# Altium PCB SunRefPCB.PcbDoc
Units mil, origin at the board's own origin, x right, y up, seen from the top; angles counter-clockwise.
Board outline 3254.33 x 2228.74 mil, 2 copper layers (Top Layer, Bottom Layer); 43 components, 27 nets, 186 pads, 42 vias.
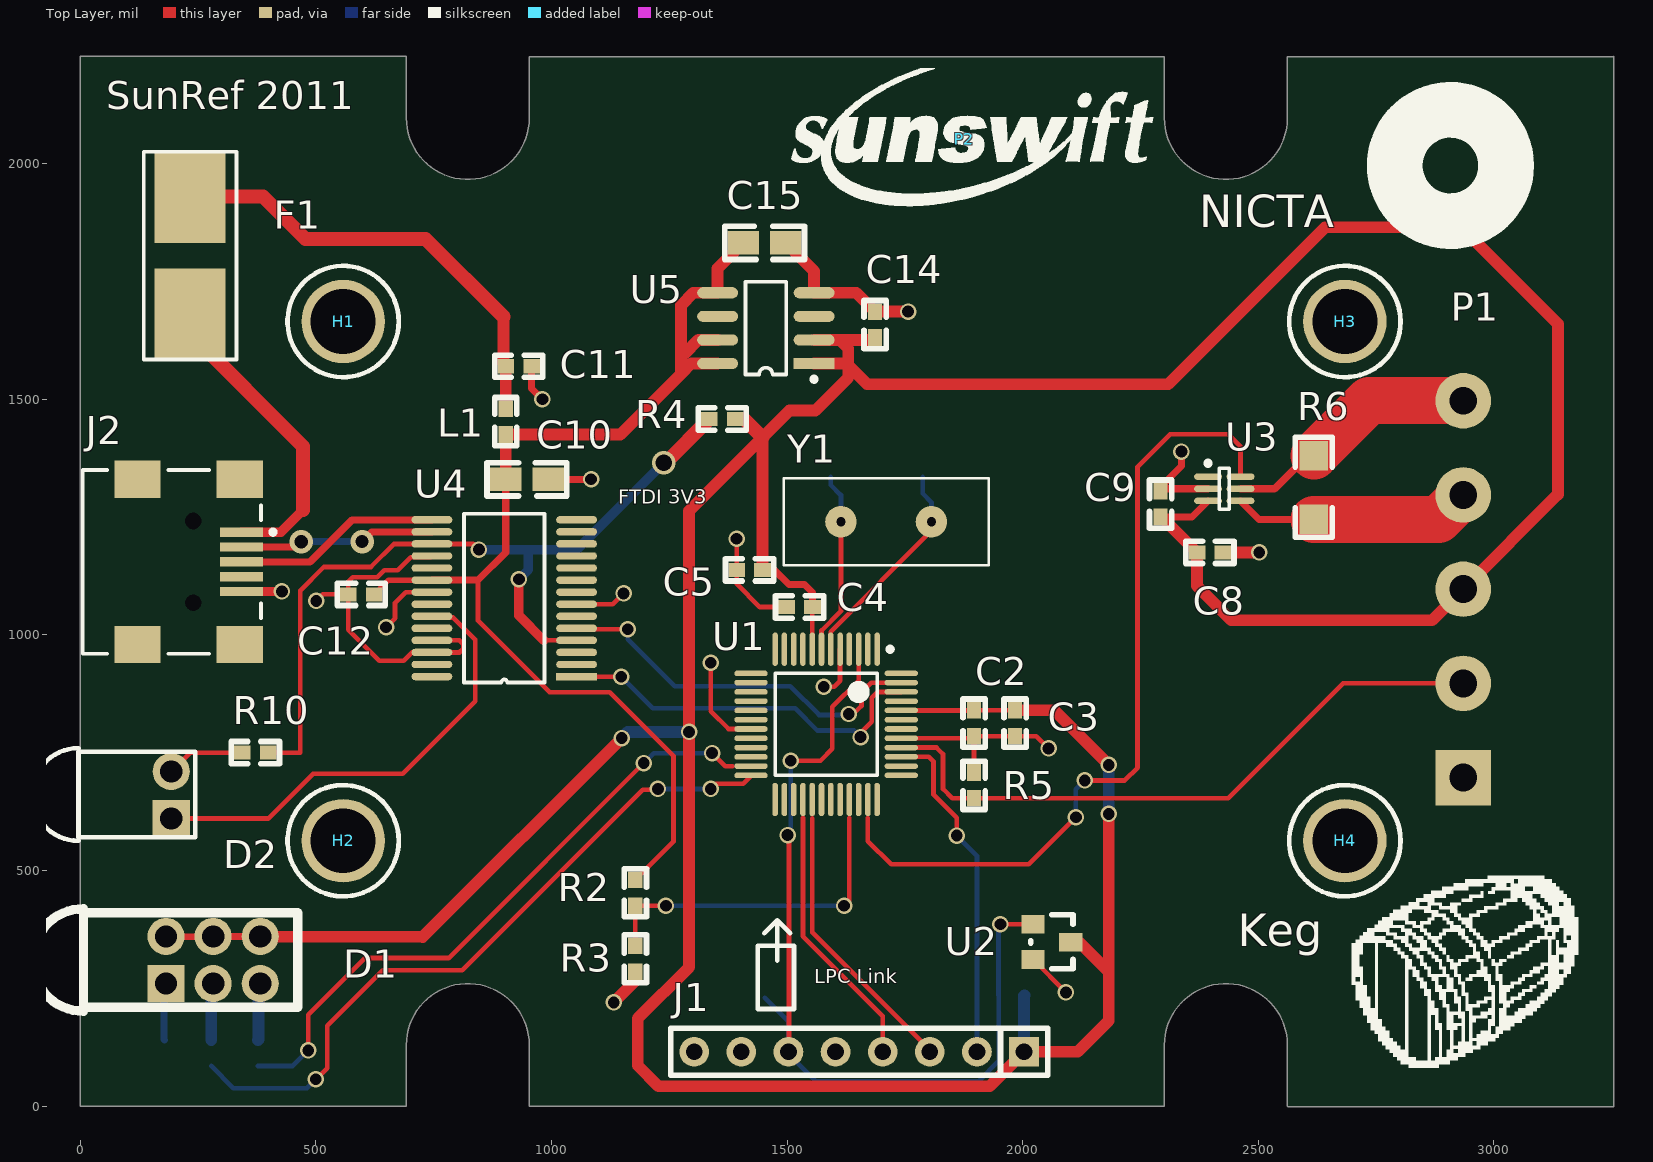
[diagram p0: Top Layer view]
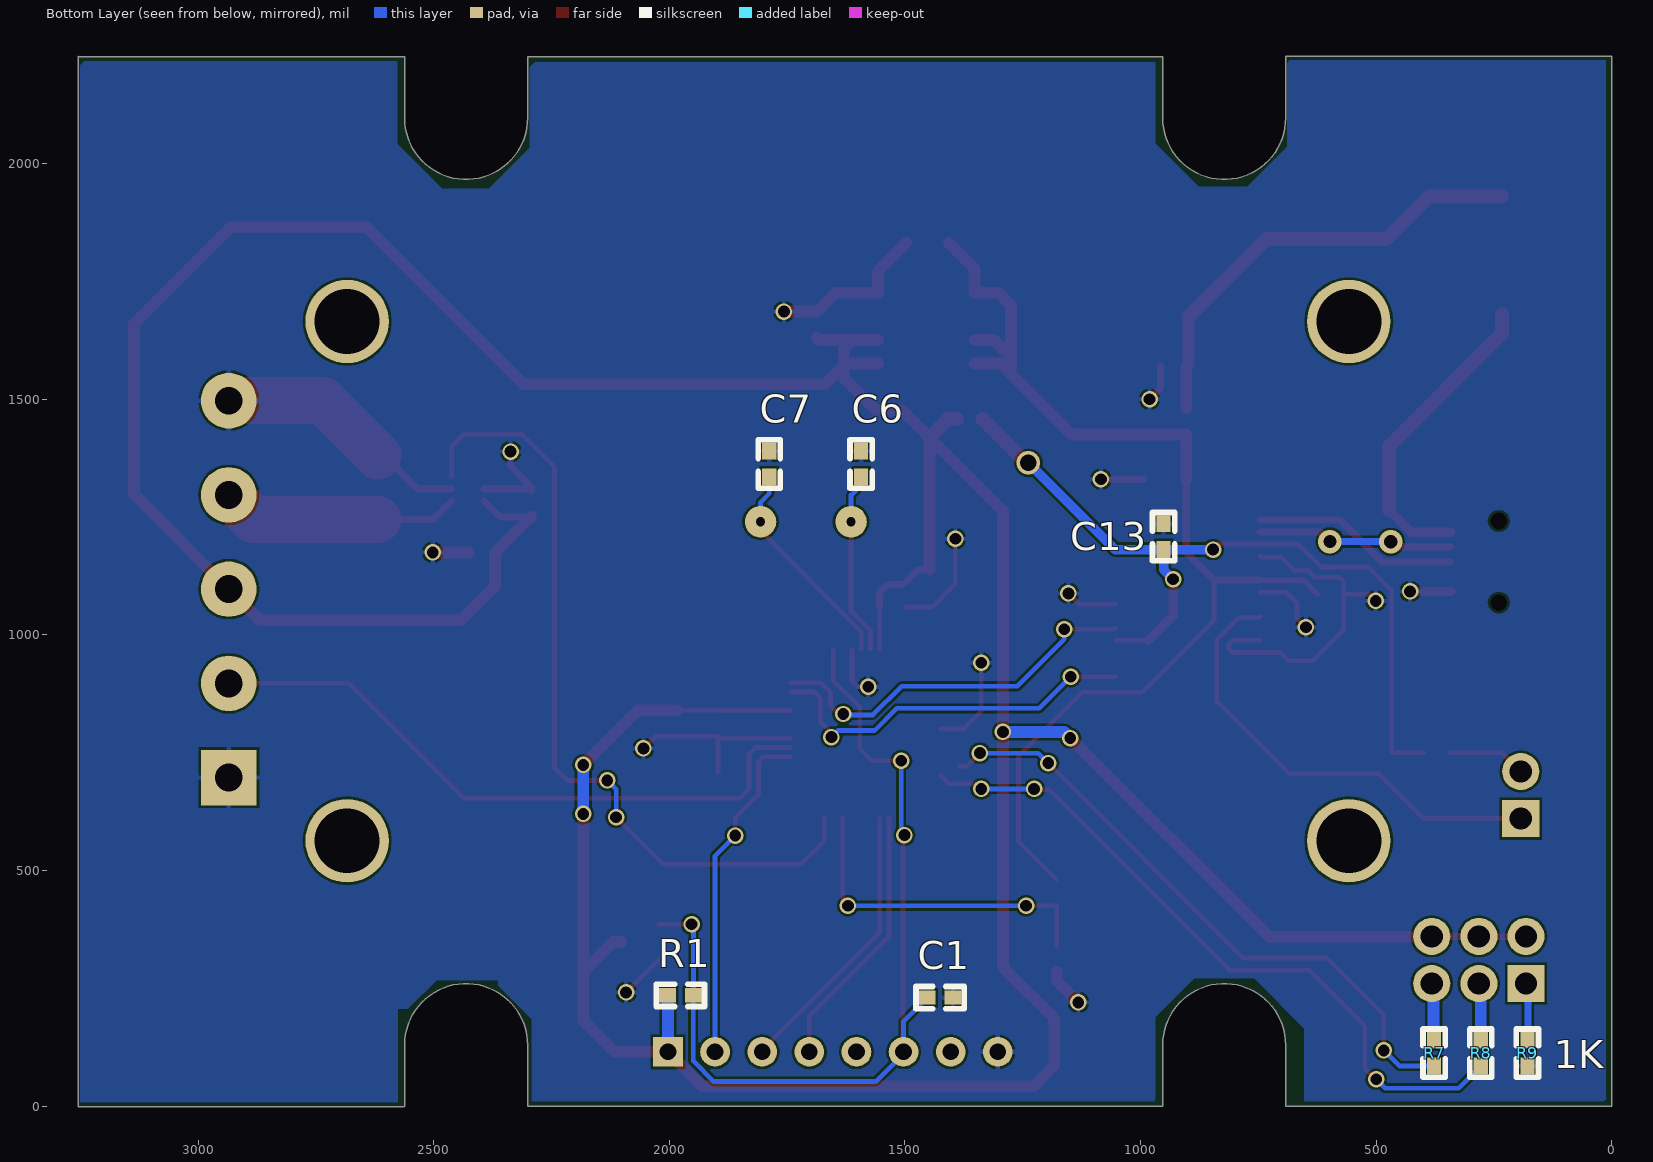
[diagram p1: Bottom Layer view, seen from below]

## Layer stack, top to bottom
Top Layer: signal copper 1.4
Dielectric: dielectric 12.6, FR-4, Dk 4.8
Bottom Layer: signal copper 1.4

## Board outline
0,-1 691.93,-1 691.93,129.32 cw(c822.44,129.32) 952.95,129.32 952.95,-1 2300.98,-1 2300.98,129.32 cw(c2431.5,129.32) 2562.01,129.32 2562.01,-1 2562.2,-1.2 3254.13,-1.2 3254.13,2227.54 3253.94,2227.35 2562.01,2227.35 2562.01,2097.03 cw(c2431.5,2097.03) 2300.98,2097.03 2300.98,2227.35 952.95,2227.35 952.95,2097.03 cw(c822.44,2097.03) 691.93,2097.03 691.93,2227.54 -0.2,2227.54

## Design rules (kind name [scope] priority, off if disabled: settings)
Clearance [All] p1: gap=5
HoleSize [All] p1: absolutevalues=TRUE maxlimit=150 minlimit=1 maxpercent=80.000 minpercent=20.000
MinimumSolderMaskSliver [All] p1: minsoldermaskwidth=0
PolygonConnect [All] p1: connectstyle=Relief reliefconductorwidth=10 reliefentries=4 polygonreliefangle="90 Angle"
RoutingVias [All] p1: holewidth=28 width=50 viastyle="Through Hole" minholewidth=15 minwidth=20 maxholewidth=40 maxwidth=50
SilkToSilkClearance [All] p1 off: silktosilkclearance=0
SilkscreenOverComponentPads [All] p1: minsilkscreentomaskgap=0
SolderMaskExpansion [All] p1: expansion=4
Width [All] p1: maxlimit=100 minlimit=10 preferedwidth=20
24 further rules are at their usual default settings.

## Classes and differential pairs
component class USBserial: C10 C11 C12 C13 C14 C15 D2 F1 J2 L1 R4 R10 U4 U5
component class TopLevel: C9 D1 P1 R2 R3 R5 R6 R7 R8 R9 U3
component class LPC_Rep: C1 C2 C3 C4 C5 C6 C7 C8 J1 R1 U1 U2 Y1

## Components (designator, comment, footprint, x,y, rotation, side; value= is the part's Value field where it differs from the comment)
C1 "10nF" 0603 1453,230 r180 bottom
C2 "10nF" 0603 1897,785 r90 top
C3 "100nF" 0603 1984,785 r90 top
C4 "10nF" 0603 1499,1059 r0 top
C5 "100nF" 0603 1393,1138 r0 top
C6 "18pF" 0603 1593,1335 r90 bottom
C7 "18pF" 0603 1788,1335 r90 bottom
C8 "100nF" 0603 2370,1175 r0 top
C9 "Cap" 0603 2293,1250 r90 top
C10 "10u" 0805 993,1330 r180 top
C11 "100n" 0603 903,1570 r0 top
C12 "100n" 0603 624,1086 r180 top
C13 "100n" 0603 951,1181 r90 bottom
C14 "2.2u" 0603 1687,1686 r270 top
C15 "10u" 0805 1407,1832 r0 top
D1 "1882-2781" LED_TRILEVEL 182,260 r90 top
D2 "LED" 3mmLED 193,610 r90 top
F1 "500mA" LITTELFUSE-154 233,1805 r90 top
H1 "HOLE" M2.5 558,1665 r0 top
H2 "HOLE" M2.5 558,563 r0 top
H3 "HOLE" M2.5 2684,1665 r0 top
H4 "HOLE" M2.5 2684,563 r0 top
J1 "LPC SWD Connector" IDC8 2003,115 r180 top
J2 "USB_MINIB" USB/SM0.8-6H5 33,1155 r180 top
L1 "FERRITE" 0603 903,1480 r270 top
P1 "Connector" TERMBLOCK5 2935,697 r180 top
P2 "SUN_LOGO" SUNSWIFTLOGO 1876,2052 r0 top (schematic designator P1)
R1 "10k" 0603 1949,235 r0 bottom
R2 "1K" 0603 1178,425 r90 top
R3 "1K" 0603 1178,285 r90 top
R4 "Res3" 0603 1335,1458 r0 top
R5 "1K" 0603 1897,708 r270 top
R6 "0R0045" 1206 2618,1380 r270 top
R7 "1K" 0603 377,140 r270 bottom
R8 "1K" 0603 278,140 r270 bottom
R9 "1K" 0603 179,140 r270 bottom
R10 "1K" 0603 344,750 r0 top
U1 "LPC11C14" TSQFP50P900X900-48N 1583,810 r270 top
U2 "XC61CN2002MR" SOT23-3 2022,386 r270 top
U3 "INA214" "SOP6 - INA214" 2428,1310 r0 top
U4 "FT232R" SSOP28w 903,1080 r180 top
U5 "MIC5200" SO8 1455,1651 r90 top
Y1 "12 MHz" HC49/4H 1928,1240 r180 top

## Footprints (in the part's own frame and the unit in brackets; to place one, negate y for a bottom-side part, rotate by r counter-clockwise, add the part's x,y. Pads: shape width x height; smd on the part's side, far side on the other; paste and mask are expansions set on the pad)
3mmLED [mm]
  round 2 hole 1.2: A(2.54,0)
  rect 2x2 hole 1.2: K(0,0)
  silkscreen extent -1.2,-1.3 3.8,7.5
0603 [mil]
  rect 35.43x30 smd: 1(0,0) 2(55,0)
  silkscreen extent -24,-24 79,24
0805 [mm]
  rect 1.7x1.27 smd: 1(0,0) 2(2.286,0)
  silkscreen extent -1,-0.9 3.3,0.9
1206 [mil]
  rect 62.99x60 smd: 1(0,0) 2(135,0)
  silkscreen extent -39,-39 173,39
HC49/4H [mm]
  round 1.7 hole 0.5: 1(3.085,0) 2(7.965,0)
  silkscreen extent 0,-2.35 11.05,2.35
IDC8 [mm]
  rect 1.6x1.6 hole 0.9: 1(0,0)
  round 1.6 hole 0.9: 2(2.54,0) 3(5.08,0) 4(7.62,0) 5(10.16,0) 6(12.7,0) 7(15.24,0) 8(17.78,0)
  silkscreen extent -1.27,-1.27 19.05,1.27
LED_TRILEVEL [mm]
  rect 2x2 hole 1.2: 1(0,0)
  round 2 hole 1.2: 2(0,-2.54) 3(0,-5.08) 4(2.54,-5.08) 5(2.54,-2.54) 6(2.54,0)
  silkscreen extent -1.49,-7.11 4.03,7.21
LITTELFUSE-154 [mm]
  rect 5x3.81 smd: 1(-3.185,0) 2(3.185,0)
  silkscreen extent -5.6,-2.51 5.6,2.5
M2.5 [mm]
  round 4.5 hole 3.5: 1(0,0)
  silkscreen extent -3,-3 3,3
SO8 [mm]
  rect 0.6x2.2 smd: 1(-1.905,-2.6)
  oval 0.6x2.2 smd: 2(-0.635,-2.6) 3(0.635,-2.6) 4(1.905,-2.6) 5(1.905,2.6) 6(0.635,2.6) 7(-0.635,2.6) 8(-1.905,2.6)
  silkscreen extent -2.88,-2.72 2.5,1.1
"SOP6 - INA214" [mm] "TSOP, 6-Leads, Body 2.2x1.4mm (max), Pitch 0.65mm, IPC Medium Density"
  oval 1.5x0.35 smd: 0(-0.875,0.65) 1(-0.875,0) 2(-0.875,-0.65) 3(0.875,-0.65) 4(0.875,0) 5(0.875,0.65)
  silkscreen extent -1,-1.1 0.28,1.5, body extent -0.7,-1.07 0.7,1.08, height 1.1
SOT23-3 [mm]
  rect 1x1.25 smd: 1(0,0) 2(1.905,0) 3(0.965,2.032)
  silkscreen extent -0.51,-0.13 2.41,2.16
SSOP28w [mm]
  rect 2.2x0.4 smd: 1(-3.82,4.28)
  oval 2.2x0.4 smd: 2(-3.82,3.63) 3(-3.82,2.98) 4(-3.82,2.33) 5(-3.82,1.68) 6(-3.82,1.03) 7(-3.82,0.38) 8(-3.82,-0.27) 9(-3.82,-0.92) 10(-3.82,-1.57) 11(-3.82,-2.22) 12(-3.82,-2.87) 13(-3.82,-3.52) 14(-3.82,-4.17) 15(3.98,-4.17) 16(3.98,-3.52) 17(3.98,-2.87) 18(3.98,-2.22) 19(3.98,-1.57) 20(3.98,-0.92) 21(3.98,-0.27) 22(3.98,0.38) 23(3.98,1.03) 24(3.98,1.68) 25(3.98,2.33) 26(3.98,2.98) 27(3.98,3.63) 28(3.98,4.28)
  silkscreen extent -2.09,-4.5 2.25,4.6
SUNSWIFTLOGO [mil] "Sunswift Logo"
  silkscreen extent -367,-141 401,150
TERMBLOCK5 [mm]
  rect 3x3 hole 1.5: 1(0,0)
  round 3 hole 1.5: 2(0,-5.08) 3(0,-10.16) 4(0,-15.24) 5(0,-20.32)
TSQFP50P900X900-48N [mm]
  oval 1.8x0.3 smd: 1(-4.05,2.75) 2(-4.05,2.25) 3(-4.05,1.75) 4(-4.05,1.25) 5(-4.05,0.75) 6(-4.05,0.25) 7(-4.05,-0.25) 8(-4.05,-0.75) 9(-4.05,-1.25) 10(-4.05,-1.75) 11(-4.05,-2.25) 12(-4.05,-2.75) 25(4.05,-2.75) 26(4.05,-2.25) 27(4.05,-1.75) 28(4.05,-1.25) 29(4.05,-0.75) 30(4.05,-0.25) 31(4.05,0.25) 32(4.05,0.75) 33(4.05,1.25) 34(4.05,1.75) 35(4.05,2.25) 36(4.05,2.75)
  oval 0.3x1.8 smd: 13(-2.75,-4.05) 14(-2.25,-4.05) 15(-1.75,-4.05) 16(-1.25,-4.05) 17(-0.75,-4.05) 18(-0.25,-4.05) 19(0.25,-4.05) 20(0.75,-4.05) 21(1.25,-4.05) 22(1.75,-4.05) 23(2.25,-4.05) 24(2.75,-4.05) 37(2.75,4.05) 38(2.25,4.05) 39(1.75,4.05) 40(1.25,4.05) 41(0.75,4.05) 42(0.25,4.05) 43(-0.25,4.05) 44(-0.75,4.05) 45(-1.25,4.05) 46(-1.75,4.05) 47(-2.25,4.05) 48(-2.75,4.05)
  silkscreen extent -4.17,-2.75 2.75,3.58, body extent -3.5,-3.5 3.5,3.5, height 1.6
USB/SM0.8-6H5 [mm] "Connector; USB2.0, Type B, SM; 5 Position; Right Angle"
  rect 2.3x0.5 smd: 1(-7.85,-1.6) 2(-7.85,-0.8) 3(-7.85,0) 4(-7.85,0.8) 5(-7.85,1.6)
  rect 2.5x2 smd: 6(-7.75,4.45) 7(-2.25,4.45) 8(-7.75,-4.45) 9(-2.25,-4.45)
  round 0.6 hole 0.9 unplated: MH1(-5.25,2.2) MH2(-5.25,-2.2)
  silkscreen extent -9.68,-4.95 0.7,4.95, body extent -8.9,-4.95 0.7,4.95, height 3.9

## Part data
C1 C2 C3 C4 C5 C6 C7 C8 C10 C11 C12 C13 C14 C15: library part CAP, "Capacitor"
C9: "Capacitor"
D1: library part LED-TRILEVEL, "Three level LED"
F1: library part FUSE2, "Fuse"
H1 H2 H3 H4: "Hole"
J1: library part LPCLink_Connector
J2: library part USB_miniB_SMT, "USB Mini B Connector"
L1: library part INDUCTOR, "Inductor"
P1: library part CONN
R1 R2 R3 R5 R6 R7 R8 R9: library part RES1, "Resistor"
R4: "Resistor"
R10: library part "Res Semi", "Semiconductor Resistor"
U1: library part LPC11C14_Full
U2: library part XC61F, "SOT23 reset generator"
U4: "USB UART IC"
U5: "MIC5200 - SO8"
Y1: library part CRYSTAL, "Crystal"

## Free pads (board coordinates)
  round 118.11 on Top Overlay mask+7.87: 2(3134,1978)

## Via types
v1: diameter 35, hole 25, Top Layer to Bottom Layer, 39 vias
v2: diameter 50, hole 28, Top Layer to Bottom Layer, 2 vias
v3: diameter 50, hole 35, Top Layer to Bottom Layer, 1 vias

## Nets (pads, with @x,y where several pads share a name; then routed paths per layer and width w, separated by ;. In a path a pad name is that pad's centre, name@x,y a point inside that pad or via, vN(x,y) a via of type N, cw(c..) or ccw(c..) an arc to the next point about the centre after c; other vN are vias at no path point)
3V3: C2.2 C3.2 C4.2 C5.2 C8.1 C9.1 C14.2 D1.4 D1.5 D1.6 J1.1 P1.3 R1.2 R4.2 U1.8 U1.44 U2.3 U3.2 U5.1 U5.2 | length 9504
  Top Layer w10: U1.8 1553.47,1058.47 C4.2 ; U1.44 1896.53,839.53 C2.2 C3.2
  Top Layer w15: D1.6@182.01,358.99 282,359.5 D1.4 ; C5.2 1473,1138 1504,1107 1537,1107 1554,1090 C4.2 ; C9.1@2295,1250 2359.14,1250 U3.2
  Top Layer w25: D1.4 727,359 v1(1149,781) ; C5.2 1448,1419 ; U5.1 1626,1576 1630,1572 ; U5.2 1612,1626 ; C14.2 1682,1626 1612,1626 ; C3.2 2067,840 v1(2183,724) ; U2.3 2120,348 2183,285 ; v1(2183,620) 2183,285 ; C9.1 2295,1250 C8.1 2370,1104 2443,1031 2869,1031 P1.3 3136,1298 3136,1660 2931,1865 2642,1865 2309,1532 1670,1532 1630,1572 ; 1448,1419 1505,1476 1560,1476 1630,1546 1630,1572 ; 1448,1419 1292,1263 v1(1292,794) 1292,295 1183,186 1183,86 1227,42 1930,42 J1.1 2117,115 2183,181 2183,285 ; 1612,1626 1630,1608 1630,1572
  Top Layer w30: R4.2 1409,1458 1448,1419
  Bottom Layer w25: v1(1149,781) 1162,794 v1(1292,794) ; J1.1 2003,234 R1.2 ; v1(2183,620) v1(2183,724)
/RESET: C1.1 J1.6 R1.1 U1.3 U2.1 | length 1947.2
  Top Layer w10: v1(1501,575) 1504,575 1504,116 J1.6 ; v1(1508,733) 1571,733 1596,758 1596,847 1651.9,902.9 U1.3 ; v1(1953,386) U2.1
  Bottom Layer w10: C1.1 1503,180 J1.6 1503,111 1562,52 1905.76,52 1949.5,95.74 1949.5,234.5 R1.1 1949,382 v1(1953,386) ; v1(1501,575) 1508,582 v1(1508,733)
GND: C1.2 C2.1 C3.1 C4.1 C5.1 C6.2 C7.2 C8.2 C9.2 C10.1 C11.2 C12.2 C13.2 C14.1 C15.2 J1.8 J2.5 P1.1 P1.5 R3.1 R5.1 R6.1 R9.2 U1.5 U1.19 U1.41 U2.2 U3.1 U3.4 U4.7 U4.18 U4.21 U4.25 U4.26 U5.4 | length 3547.5
  Top Layer w10: v1(501,1072) 515,1086 C12.2 ; v1(649,1016) 668,1035 668,1068 690.63,1090.63 U4.21 ; U4.25 804.73,988.27 813,980 813,971 804.68,962.68 U4.26 704.12,962.68 686.44,945 635,945 569,1011 C12.2 ; U4.18 743.59,1164.69 701.4,1164.69 688,1151.29 688,1151.22 674,1137.22 645.52,1137.22 630.3,1122 578,1122 569,1113 C12.2 ; U4.7 1130.04,1065.04 v1(1153,1088) ; v1(1338,941) 1338,838 1375.84,800.16 U1.19 ; v1(1393,1204) C5.1 1393,1108 1442,1059 C4.1 ; v1(1578,890) 1600,890 1612.53,902.53 U1.5 ; U1.41 1892.47,780.47 C2.1 ; R5.1 C2.1 ; U2.2 v1(2092,241) ; v1(2055,759) 2029,785 C3.1 C2.1
  Top Layer w15: C11.2 958,1523 v1(981,1500) ; C10.1 v1(1084,1330) ; v1(2337,1389) 2337,1358 2293,1314 C9.2 2298,1310 U3.1 ; U3.4 2535,1310 2605,1380 R6.1
  Top Layer w20: J2.5 v1(427.99,1092.01)
  Top Layer w25: v1(1132,220) 1178,266 R3.1 ; C15.2 1557.36,1771.64 U5.4 1647,1726 C14.1 v1(1757,1686) ; C8.2 v1(2502,1175)
  Top Layer w100: R6.1 2735,1497 P1.5
LEDRED: R7.2 U1.23 | length 1338.1
  Top Layer w10: v1(484,118) 484,194 604,314 782,314 v1(1196,728) ; v1(1341,749) 1368.58,721.42 1384.14,721.42
  Bottom Layer w10: R7.2 451,85 v1(484,118) ; v1(1196,728) 1217,749 v1(1341,749)
LEDYLW: R8.2 U1.24 | length 1496.2
  Top Layer w10: v1(500,57) 501,57 524,80 524,170 642,288 811,288 1194,671 1228,671 v1(1226,673) ; v1(1338,673) 1349,684 1407.04,684 U1.24@1423.55,700.51
  Bottom Layer w10: R8.2 325,38 481,38 v1(500,57) ; v1(1226,673) v1(1338,673)
NetC11_1: C11.1 F1.2 L1.1 | length 967.9
  Top Layer w25: 898,1675 898,1575 C11.1 L1.1
  Top Layer w30: F1.2 387.61,1930.39 478,1840 733,1840 898,1675
NetD1_1: D1.1 R9.1 | length 120.4
  Bottom Layer w15: D1.1@178,260 178,141 R9.1
NetD1_2: D1.2 R8.1 | length 120
  Bottom Layer w25: R8.1 D1.2@278,260
NetD1_3: D1.3 R7.1 | length 125.4
  Bottom Layer w25: R7.1 378,141 D1.3@378,265
NetD2_A: D2.A R10.1 | length 167.6
  Top Layer w10: D2.A 233,750 R10.1
NetD2_K: D2.K U4.23 | length 991.3
  Top Layer w10: D2.K 399,610 494,705 684,705 838,859 838,989.95 791.21,1036.73 749.02,1036.73 U4.23
NetF1_1: F1.1 J2.1 | length 664.4
  Top Layer w20: J2.1 425.99,1217.99 473,1265
  Top Layer w30: F1.1 233,1640 473,1400 473,1265
NetJ2_2: J2.2 U4.16 | length 417.5
  Top Layer w15: J2.2 458.14,1186.5 v2(469.14,1197.5) ; v2(598,1198) 618.58,1218.58 U4.16
  Bottom Layer w15: v2(469.14,1197.5) 469.64,1198 v2(598,1198)
NetJ2_3: J2.3 U4.15 | length 441.2
  Top Layer w15: J2.3 488,1155 577.17,1244.17 U4.15
NetP1_2: P1.2 R5.2 U1.40 | length 1381.6
  Top Layer w10: U1.40 1817.21,760.79 1831,747 1831,673 1851,653 R5.2 2436,653 2680,897 P1.2
NetP1_4: P1.4 R6.2 U3.3 | length 510.4
  Top Layer w15: U3.3 2501.86,1245 R6.2
  Top Layer w100: R6.2 2883,1245 P1.4
NetR2_1: R2.1 R3.2 U1.33 | length 718.8
  Top Layer w10: R3.2 R2.1 v1(1243,425) ; v1(1621,425) 1632.21,436.21 1632.21,611.14
  Bottom Layer w10: v1(1243,425) v1(1621,425)
NetU1_35: U1.35 U3.5 | length 1722
  Top Layer w10: 1671.58,611.14 1671.58,562.42 1721,513 2013,513 v1(2113,613) ; v1(2132,691) 2217,691 2244,718 2244,1357 2313,1426 2436,1426 2462.45,1399.55 U3.5
  Bottom Layer w10: v1(2113,613) 2113,672 v1(2132,691)
NetU1_46: U1.46 U4.1 | length 816.6
  Top Layer w10: U4.1 1053.89,911 v1(1148,911) ; v1(1656,783) 1656,792 1680,816 1680,866 1692.9,878.9 U1.46
  Bottom Layer w10: v1(1148,911) 1215,844 1517,844 1564,797 1642,797 v1(1656,783)
NetU1_47: U1.47 U4.5 | length 827.1
  Top Layer w10: U4.5@1053.54,1014 U4.5 1055.25,1012 v1(1162,1012) ; v1(1631,832) 1641,832 1658,849 1658,878 1678.58,898.58 U1.47
  Bottom Layer w10: v1(1162,1012) 1162,991 1262,891 1507,891 1568,830 1633,830 v1(1631,832)
TCLK: J1.3 U1.29 | length 599.1
  Top Layer w10: 1553.79,610.83 1553.79,368.5 1803,119.28 J1.3
TDO: J1.4 U1.28 | length 566.2
  Top Layer w10: 1533.79,611.14 1533.79,360.21 1703,191 J1.4
TMS: J1.2 U1.39 | length 726.8
  Top Layer w10: U1.39 1800.9,741.1 1811,731 1811,661 1860,612 v1(1860,574)
  Bottom Layer w10: v1(1860,574) 1903,531 J1.2
USB3V3: C13.1 R4.1 R10.2 U4.4 U4.17 | length 1733.2
  Top Layer w10: R10.2 467,750 467,1094 517,1144 617,1144 665.99,1192.99 U4.17 834.01,1192.99 v1(846,1181) ; 983.73,988.27 U4.4
  Top Layer w20: v1(931,1118) 931,1041 983.73,988.27
  Top Layer w30: v3(1238,1365) 1242,1365 R4.1
  Bottom Layer w20: v1(846,1181) C13.1 ; v1(931,1118) 951,1138 C13.1 ; v3(1238,1365) 1054,1181 C13.1
USB5V: C10.2 C12.1 C15.1 L1.2 R2.2 U4.20 U5.5 U5.7 U5.8 | length 2447.2
  Top Layer w10: 844.22,1116.22 844.22,1029.78 996,878 1124,878 1259,743 1259,561 R2.2
  Top Layer w12: C12.1 654.22,1116.22 U4.20
  Top Layer w15: U4.20 844.22,1116.22 903,1175 C10.2
  Top Layer w25: C10.2 L1.2 1146,1425 1275,1554 ; U5.8 1297,1576 1275,1554 ; U5.7 1312,1626 1283,1597 1275,1597 ; C15.1 1352.64,1777.64 U5.5 1301,1726 1275,1700 1275,1597 ; 1275,1554 1275,1597
XTALIN: C7.1 U1.6 Y1.1 | length 461.7
  Top Layer w10: U1.6 1592.84,1006.84 1806.54,1220.54 Y1.1
  Bottom Layer w10: C7.1 1788,1300 1806.54,1281.46 Y1.1
XTALOUT: C6.1 U1.7 Y1.2 | length 391.5
  Top Layer w10: U1.7 1573.16,1009.16 1614.42,1050.42 Y1.2
  Bottom Layer w10: C6.1 1593,1318 1614.42,1296.58 Y1.2
pads on no net: H1.1 H2.1 H3.1 H4.1 J1.5 J1.7 J2.4 J2.6 J2.7 J2.8 J2.9 J2.MH1 J2.MH2 U1.1 U1.2 U1.4 U1.9 U1.10 U1.11 U1.12 U1.13 U1.14 U1.15 U1.16 U1.17 U1.18 U1.20 U1.21 U1.22 U1.25 U1.26 U1.27 U1.30 U1.31 U1.32 U1.34 U1.36 U1.37 U1.38 U1.42 U1.43 U1.45 U1.48 U3.0 U4.2 U4.3 U4.6 U4.8 U4.9 U4.10 U4.11 U4.12 U4.13 U4.14 U4.19 U4.22 U4.24 U4.27 U4.28 U5.3 U5.6

## Polygon pours and split planes (outlines as drawn)
GND on Bottom Layer "GNDPLANE" (solid, remove dead copper, pour order 1001): 13,2219 683,2219 685,2217 689,2213 689,2037 689,2036 761,1964 774,1951 875,1951 877,1951 967,2041 969,2043 969,2215 2286,2215 2296,2205 2296,2049 2296,2034 2377,1953 2383,1947 2482,1947 2576,2041 2578,2043 2578,2217 3242,2217 3250,2209 3250,8 2574,8 2576,10 2576,206 2555,206 2494,267 2363,267 2363,255 2296,188 2292,184 2292,10 965,10 969,14 969,151 969,188 888,269 886,271 765,271 759,271 651,163 653,161 653,10 17,10 11,16 13,18 13,2219

## Silkscreen, mask and mechanical layers (free items; w line width, h text height)
Top Overlay:
  circle w118.11: c2907.89,1996 r118.11
  region: 137 vertices and 55 holes, not listed, extent 2699,81 3179,489
  lines w10: 1451.5,366.5 1479,394 ; 1479,309 1479,394 ; 1506.5,366.5 1479,394 ; 1438,206 1438,340 1515,340 1515,206 1438,206
  text "SunRef 2011" at 55,2116 h60
  text "NICTA" at 2375,1842 h118.11
  text "FTDI 3V3" at 1142,1278 h30
  text "Keg" at 2457,316 h118.11
  text "LPC Link" at 1558,261 h30
Bottom Overlay:
  text "1K" at 123,80 h60
Mechanical 1:
  circle w10: c563.98,561.99 r63.05
  circle w10: c2689.96,561.99 r63.05
  circle w10: c2689.96,1664.35 r63.05
  circle w10: c563.98,1664.35 r63.05
  lines w10: -0.2,-1.2 -0.2,2227.54 691.93,2227.54 691.93,2097.23 ; 0,-1 691.93,-1 691.93,129.32 cw(c822.44,129.32) 952.95,129.32 952.95,-1 2300.98,-1 2300.98,129.32 cw(c2431.5,129.32) 2562.01,129.32 2562.01,-1 ; 14.8,421.8 472.8,421.8 ; 21.8,208.8 469.8,208.8 ; 691.93,2097.03 ccw(c822.44,2097.03) 952.95,2097.03 952.95,2227.35 2300.98,2227.35 2300.98,2097.03 ccw(c2431.5,2097.03) 2562.01,2097.03 2562.01,2227.35 3253.94,2227.35 ; 2562.2,-1.2 3254.13,-1.2 3254.13,2227.54
  text "Hole = 3.5mm" at 479,2509 h39.37
  text "Press q to toggle mil and mm" at -1914.2,2014.8 h39.37
  text "CAN_2 Placement" at -984.45,1693.8 h39.37
  text "X 6.300mm" at -984.45,1591.8 h39.37
  text "Y 42.375mm" at -984.45,1486.8 h39.37
  text "CAN_1 Placement" at -984.45,917.8 h39.37
  text "X 6.300mm" at -984.45,815.8 h39.37
  text "Y 22.750mm" at -984.45,710.8 h39.37
  text "LED Placement" at -984.45,373.8 h39.37
  text "X 4.755mm" at -984.45,271.8 h39.37
  text "Y 6.770mm" at -984.45,166.8 h39.37

## Text inside footprints (layer, text, board x,y; h text height)
J2: Mechanical 1 "PCB Edge" at 15.98,1313.91 h9.84 r270